# Altium PCB SW-SMD_4P_DSHP02TSGET.pcbdoc
Units mm, origin at the board's own origin, x right, y up, seen from the top; angles counter-clockwise.
Board outline 16.93 x 21.84 mm, 2 copper layers (Top Layer, Bottom Layer); 1 components, 0 nets, 4 pads, 0 vias.
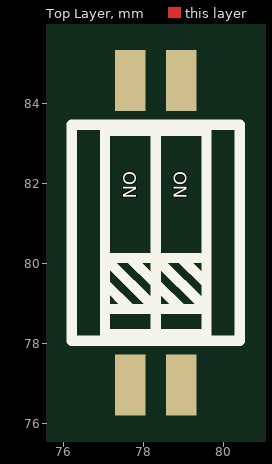
[diagram p0: Top Layer view]
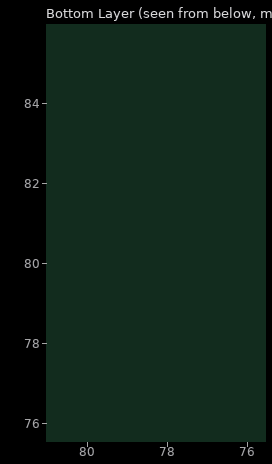
[diagram p1: Bottom Layer view, seen from below]

## Layer stack, top to bottom
Top Solder: solder mask 0.0102, Solder Resist, Dk 3.5
Top Layer: signal copper 0.0356
Dielectric 1: dielectric 0.32, FR-4, Dk 4.8
Bottom Layer: signal copper 0.0356
Bottom Solder: solder mask 0.0102, Solder Resist, Dk 3.5

## Board outline
86.78,69.85 69.85,69.85 69.85,91.694 86.78,91.694

## Components (designator, comment, footprint, x,y, rotation, side; value= is the part's Value field where it differs from the comment)
? "SW-SMD_4P_DSHP02TSGET" SW-SMD_4P_DSHP02TSGET 78.3,80.772 r0 top

## Footprints (in the part's own frame and the unit in brackets; to place one, negate y for a bottom-side part, rotate by r counter-clockwise, add the part's x,y. Pads: shape width x height; smd on the part's side, far side on the other; paste and mask are expansions set on the pad)
SW-SMD_4P_DSHP02TSGET [mil]
  rect 30x60 smd: 1(25,150) 2(-25,150) 3(-25,-150) 4(25,-150)
  silkscreen extent -83,-106 83,106

## Nets (pads, with @x,y where several pads share a name; then routed paths per layer and width w, separated by ;. In a path a pad name is that pad's centre, name@x,y a point inside that pad or via, vN(x,y) a via of type N, cw(c..) or ccw(c..) an arc to the next point about the centre after c; other vN are vias at no path point)
pads on no net: ?.1 ?.2 ?.3 ?.4

## Text inside footprints (layer, text, board x,y; h text height)
?: Top Overlay "ON" at 77.482,82.31 h0.33 r270; Top Overlay "ON" at 78.752,82.31 h0.33 r270